# EAGLE board AguaC (EAGLE 7.6.0)
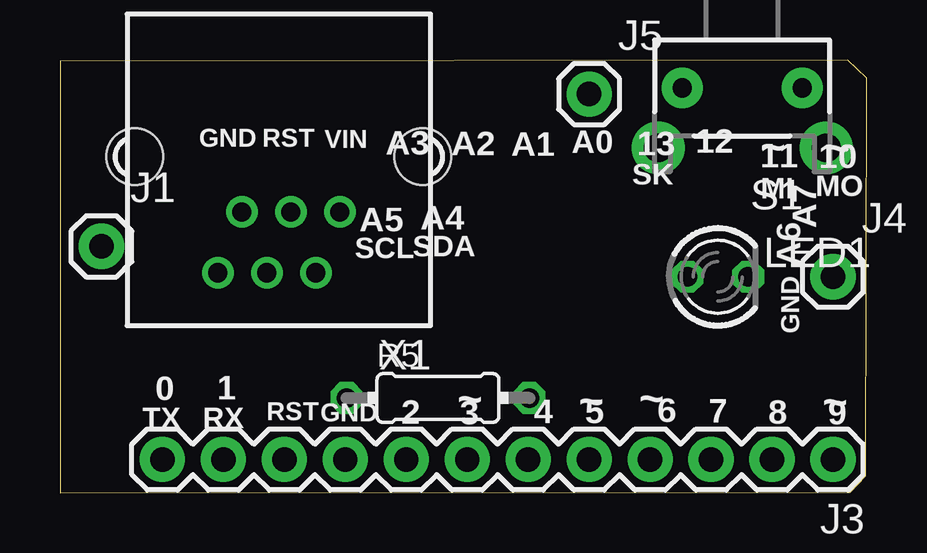
[diagram p0: board, top side]
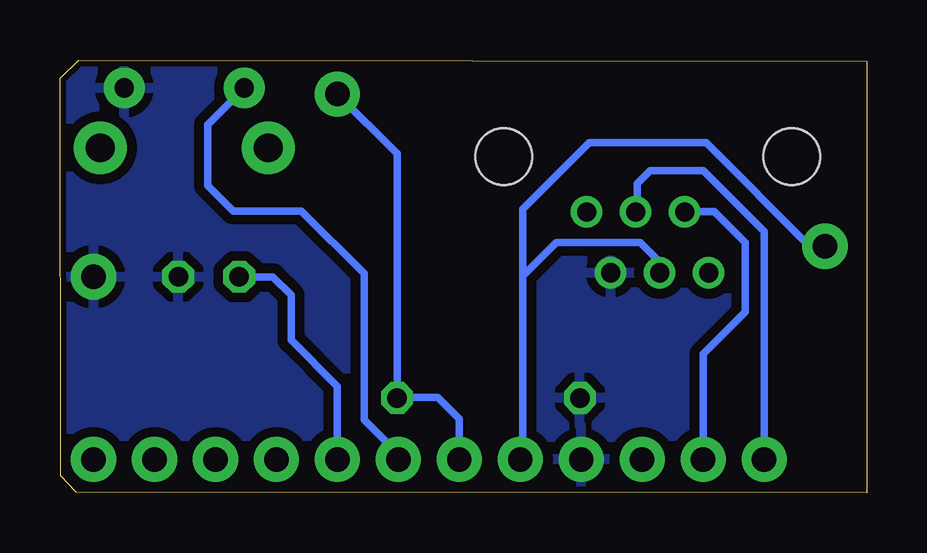
[diagram p1: board, bottom side, seen from below]

Size 33.6 x 18.06 mm. Coordinates in mm from the lower left corner, seen from the top.
Outline: 0,0 32.92,0.02 33.58,0.71 33.6,17.3 32.82,18.06 0,18.01 0,0
Copper layers (1*16): Top 0.035mm / dielectric 1.5mm / Bottom 0.035mm
Design rules "ITEADstudio_DRC *": minimum track width 6mil, minimum drill 12mil, track to track 16mil, track to pad 12mil, pad to pad 6mil, via to via 6mil, smd to smd 0mil, copper to edge 10mil, drill to drill 10mil, minimum pad ring 10mil, minimum via ring 6mil, stop-mask expansion 2mil, vias tented up to drill 100mil, thermal gap 15mil
Net classes: 1 power: width 0.381 mm, clearance 0.254 mm

## Footprints (pad centres in the part's own frame; a part is rotated, then mirrored left to right if it is on the bottom)
1X01 = drill 1.016 pad 1.88: 1 0,0
1X12 = drill 1.016 pad 1.88: 1 0,0; 2 2.54,0; 3 5.08,0; 4 7.62,0; 5 10.16,0; 6 12.7,0; 7 15.24,0; 8 17.78,0; 9 20.32,0; 10 22.86,0; 11 25.4,0; 12 27.94,0
LED3MM = drill 0.813 octagon: A -1.27,0; K 1.27,0
0204/7 = drill 0.813 octagon: 1 -3.81,0; 2 3.81,0
TACTILE-PTH-SIDEEZ = drill 0.8 pad 1.7: 1 -2.5,0; 2 2.5,0 | drill 1.2 pad 2.2: ANCHOR1 -3.5,2.5; ANCHOR2 3.5,2.5
YH-55-10 = drill 0.8 pad 1.3: 1 -2.54,2.3; 2 -1.54,4.84; 3 -0.5,2.3; 4 0.5,4.84; 5 1.54,2.3; 6 2.54,4.84 | hole 2.36: -6,0; 6,0

## Placement (x,y rotation side)
J1  [1X01]  1.73,10.29 0 top
J3  [1X12]  32.21,1.4 180 top
J4  [1X01]  32.21,9.02 0 top
J5  [1X01]  22.05,16.64 0 top
LED1  [LED3MM]  27.41,9.02 0 top
R5  [0204/7]  15.75,3.96 0 top
S1  SWITCH-MOMENTARY-2SIDE_EZ  [TACTILE-PTH-SIDEEZ]  28.42,16.89 180 top
X1  YH-55-10  [YH-55-10]  9.12,14.02 180 top

## Library data of the parts
J1 J3-J5 = SparkFun-Connectors
LED1 = led
R5 = rcl
S1 = SparkFun-Electromechanical
X1 = con-wenzhou-yihua; OC_FARNELL: unknown; OC_NEWARK: unknown

## Nets
AGND [power]: J4.1 LED1.K S1.1
GND [power]: J3.9 R5.1 X1.2
N$1: J3.6 S1.2
N$3: J3.5 LED1.A
N$4: J3.12 X1.3
N$6: J3.11 X1.5
N$14: J3.7 J5.1 R5.2
VIN: J1.1 J3.8 X1.4

## Tracks (layer width: path | path; a pad name or v marks a point on that pad's centre or on a via)
AGND
  pour Bottom: 0.1,17.91 33.35,17.91 33.71,0.08 0.23,0.15
GND
  pour Bottom: 0.13,17.91 33.45,17.86 33.53,0.05 0.2,0.1
N$1
  Bottom 0.305: S1.2 27.46,15.36 27.46,12.83 26.39,11.76 23.55,11.76 20.93,9.14 20.93,3.05 19.51,1.63 J3.6
N$3
  Bottom 0.305: J3.5 22.05,4.45 23.98,6.37 23.98,8.25 24.74,9.02 LED1.A
N$4
  Bottom 0.305: J3.12 4.27,10.9 6.81,13.44 9.02,13.44 9.55,12.9 9.55,11.79 X1.3
N$6
  Bottom 0.305: J3.11 6.81,5.79 5.05,7.54 5.05,10.44 6.35,11.73 7.56,11.73 X1.5
N$14
  Bottom 0.305: J3.7 16.97,3.1 17.86,3.99 19.53,3.99 R5.2 19.56,14.15 J5.1
VIN
  Bottom 0.305: J1.1 2.36,10.29 6.68,14.61 11.56,14.61 14.33,11.84 14.33,9.04 | 14.33,9.04 14.33,1.5 J3.8 | X1.4 8.62,9.64 9.42,10.44 12.93,10.44 14.33,9.04

## Text on the board
_tsilk: VIN | A3 | A2 | A1 | 13 | 12 | ~ | GND | RST | A0 | 11 | 10 | ~ | A4 | SK | MI | A7 | MO | A5 | A6 | SCL | SDA | GND | 0 | 1 | 6 | TX | RX | RST | GND | 2 | ~ | 3 | 4 | ~ | 5 | ~ | 7 | 8 | ~ | 9